# EAGLE board C4 (EAGLE 7.5.0)
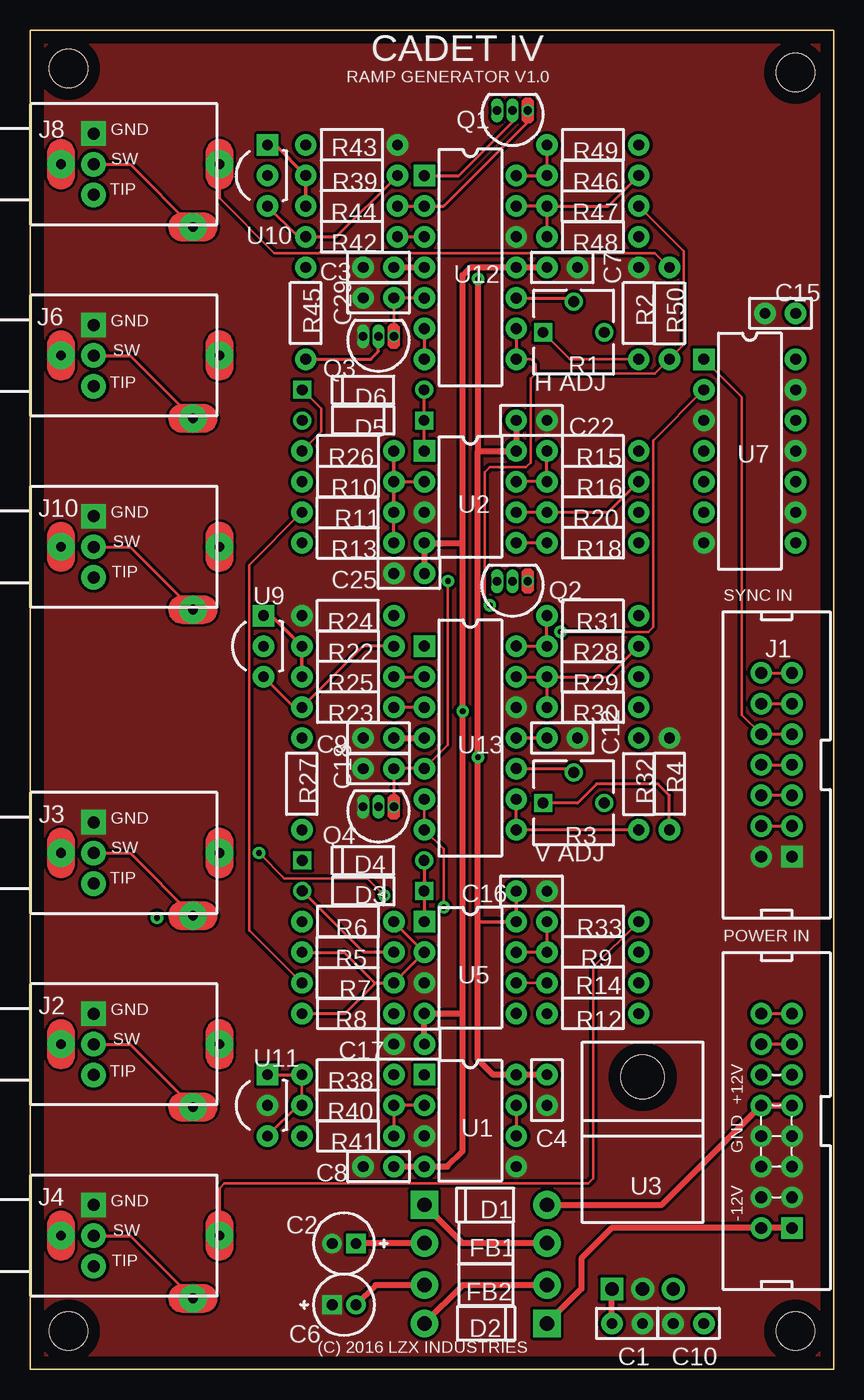
[diagram p0: board, top side]
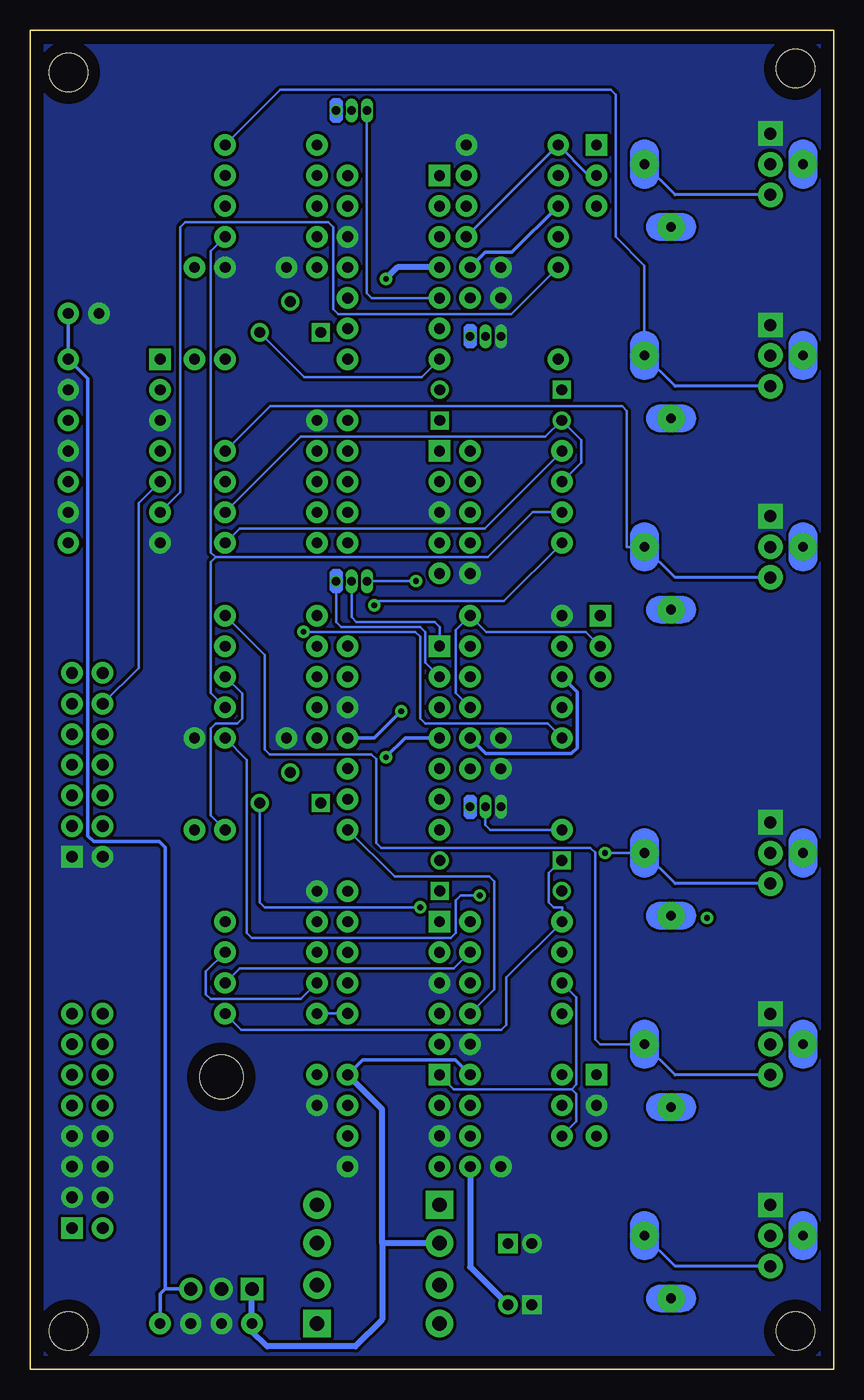
[diagram p1: board, bottom side, seen from below]

Size 66.66 x 111.12 mm. Coordinates in mm from the lower left corner, seen from the top.
Outline: 0,0 66.66,0 66.66,111.12 0,111.12 0,0
Copper layers (1*16): Top 0.035mm / dielectric 1.5mm / Bottom 0.035mm
Design rules "default *": minimum track width 10mil, minimum drill 0.61mm, track to track 8mil, track to pad 8mil, pad to pad 8mil, via to via 8mil, smd to smd 8mil, copper to edge 40mil, drill to drill 8mil, minimum pad ring 0mil, minimum via ring 8mil, stop-mask expansion 2mil, vias tented up to drill 19mil, thermal gap 10mil
Net classes: 1 Power Rails: width 0.305 mm, clearance 0.178 mm, clearance 0.178 mm to class 0
Holes 3.17 mm at 3.18,3.17 3.18,107.95 63.49,3.17 63.49,107.62

## Footprints (pad centres in the part's own frame; a part is rotated, then mirrored left to right if it is on the bottom)
CAP-2.54/6.6x3 = drill 0.889 pad 1.778: 1 -1.27,0; 2 1.27,0
CAPPR-2/5.08 = drill 0.9 pad 1.6 square: 1 -0.991,0 | drill 0.9 pad 1.6: 2 0.991,0
CAP-2.54/6.6x3_C3 = drill 0.889 pad 1.778: 1 -1.27,0; 2 1.27,0
CAP-2.54/6.6x3_C4 = drill 0.889 pad 1.778: 1 -1.27,0; 2 1.27,0
CAPPR-2/5.08_C6 = drill 0.9 pad 1.6 square: 1 -0.991,0 | drill 0.9 pad 1.6: 2 0.991,0
CAP-2.54/6.6x3_C7 = drill 0.889 pad 1.778: 1 -1.27,0; 2 1.27,0
CAP-2.54/6.6x3_C8 = drill 0.889 pad 1.778: 1 -1.27,0; 2 1.27,0
CAP-2.54/6.6x3_C10 = drill 0.889 pad 1.778: 1 -1.27,0; 2 1.27,0
CAP-2.54/6.6x3_C15 = drill 0.889 pad 1.778: 1 -1.27,0; 2 1.27,0
CAP-2.54/6.6x3_C18 = drill 0.889 pad 1.778: 1 -1.27,0; 2 1.27,0
CAP-2.54/6.6x3_C22 = drill 0.889 pad 1.778: 1 -1.27,0; 2 1.27,0
CAP-2.54/6.6x3_C25 = drill 0.889 pad 1.778: 1 -1.27,0; 2 1.27,0
DO-41 = drill 1.2 pad 2.286 square: 1 -5.08,0 | drill 1.2 pad 2.286: 2 5.08,0
DO-41_D2 = drill 1.2 pad 2.286 square: 1 -5.08,0 | drill 1.2 pad 2.286: 2 5.08,0
DO-35 = drill 0.9 pad 1.5 square: 1 -5.05,0 | drill 0.9 pad 1.5: 2 5.05,0
DO-35_D4 = drill 0.9 pad 1.5 square: 1 -5.05,0 | drill 0.9 pad 1.5: 2 5.05,0
FB-10.16/4.45x3.5 = drill 1.194 pad 2.286: 1 -5.08,0; 2 5.08,0
IDC14M = drill 0.965 pad 1.778 square: 1 7.62,1.27 | drill 0.965 pad 1.778: 2 7.62,-1.27; 3 5.08,1.27; 4 5.08,-1.27; 5 2.54,1.27; 6 2.54,-1.27; 7 0,1.27; 8 0,-1.27; 9 -2.54,1.27; 10 -2.54,-1.27; 11 -5.08,1.27; 12 -5.08,-1.27; 13 -7.62,1.27; 14 -7.62,-1.27
PJ302M = drill 0.8 pad 2.286: 1A 2.54,0; 2A 13.487,-5.207; 3A 15.697,0 | drill 1 pad 2.032 square: 1B 5.258,2.54 | drill 1 pad 2.032: 2B 5.258,0; 3B 5.258,-2.54
IDC16M = drill 0.965 pad 1.778 square: 1 8.89,1.27 | drill 0.965 pad 1.778: 2 8.89,-1.27; 3 6.35,1.27; 4 6.35,-1.27; 5 3.81,1.27; 6 3.81,-1.27; 7 1.27,1.27; 8 1.27,-1.27; 9 -1.27,1.27; 10 -1.27,-1.27; 11 -3.81,1.27; 12 -3.81,-1.27; 13 -6.35,1.27; 14 -6.35,-1.27; 15 -8.89,1.27; 16 -8.89,-1.27
TO-92 = drill 0.7 pad 1: 1 -1.27,0 | drill 0.7 pad 1 long: 2 0,0; 3 1.27,0
TO-92_Q2 = drill 0.7 pad 1: 1 -1.27,0 | drill 0.7 pad 1 long: 2 0,0; 3 1.27,0
TO-92_Q3 = drill 0.7 pad 1: 1 -1.27,0 | drill 0.7 pad 1 long: 2 0,0; 3 1.27,0
3362P = drill 0.9 pad 1.5 square: 1 -1.27,2.54 | drill 0.9 pad 1.5: 2 1.27,0; 3 -1.27,-2.54
RES-7.62/5.1x2.5 = drill 0.889 pad 1.778: 1 -3.81,0; 2 3.81,0
RES-7.62/5.1x2.5_R6 = drill 0.889 pad 1.778: 1 -3.81,0; 2 3.81,0
DIP-8 = drill 0.9 pad 1.778 square: 1 -3.81,3.81 | drill 0.9 pad 1.778: 2 -3.81,1.27; 3 -3.81,-1.27; 4 -3.81,-3.81; 5 3.81,-3.81; 6 3.81,-1.27; 7 3.81,1.27; 8 3.81,3.81
TO-220H = drill 1.1 pad 1.9 square: 1 -2.54,0 | drill 1.1 pad 1.9: 2 0,0; 3 2.54,0 | hole 3.6: 0,17.6
DIP-14 = drill 0.9 pad 1.778 square: 1 -3.81,7.62 | drill 0.9 pad 1.778: 2 -3.81,5.08; 3 -3.81,2.54; 4 -3.81,0; 5 -3.81,-2.54; 6 -3.81,-5.08; 7 -3.81,-7.62; 8 3.81,-7.62; 9 3.81,-5.08; 10 3.81,-2.54; 11 3.81,0; 12 3.81,2.54; 13 3.81,5.08; 14 3.81,7.62
TO-92-100R = drill 0.889 pad 1.778 square: 1 2.54,0 | drill 0.889 pad 1.778: 2 0,0; 3 -2.54,0
TO-92-100R_U10 = drill 0.889 pad 1.778 square: 1 2.54,0 | drill 0.889 pad 1.778: 2 0,0; 3 -2.54,0

## Placement (x,y rotation side)
C1  330n  [CAP-2.54/6.6x3]  49.53,3.81 0 top
C2  10u 25V  [CAPPR-2/5.08]  26.04,10.44 180 top
C3  100n  [CAP-2.54/6.6x3_C3]  28.89,91.44 180 top
C4  100n  [CAP-2.54/6.6x3_C4]  42.86,23.18 270 top
C6  10u 25V  [CAPPR-2/5.08_C6]  26.04,5.36 0 top
C7  100n  [CAP-2.54/6.6x3_C7]  44.13,91.44 180 top
C8  100n  [CAP-2.54/6.6x3_C8]  28.89,16.83 0 top
C9  100n  [CAP-2.54/6.6x3_C3]  28.89,52.39 180 top
C10  100n  [CAP-2.54/6.6x3_C10]  54.61,3.81 180 top
C12  100n  [CAP-2.54/6.6x3_C7]  44.13,52.39 180 top
C15  100n  [CAP-2.54/6.6x3_C15]  62.23,87.63 180 top
C16  100n  [CAP-2.54/6.6x3_C8]  41.59,39.69 0 top
C17  100n  [CAP-2.54/6.6x3_C8]  31.43,26.99 0 top
C18  4.7uF COG/NPO  [CAP-2.54/6.6x3_C18]  28.89,49.85 180 top
C22  100n  [CAP-2.54/6.6x3_C22]  41.59,78.74 0 top
C25  100n  [CAP-2.54/6.6x3_C25]  31.43,66.04 0 top
C29  15pF COG/NPO  [CAP-2.54/6.6x3_C18]  28.89,88.9 180 top
D1  1N4001  [DO-41]  37.78,13.65 0 top
D2  1N4001  [DO-41_D2]  37.78,3.81 180 top
D3  1N5711  [DO-35]  27.62,39.69 180 top
D4  1N5711  [DO-35_D4]  27.62,42.23 0 top
D5  1N5711  [DO-35]  27.62,78.74 180 top
D6  1N5711  [DO-35_D4]  27.62,81.28 0 top
FB1  68R  [FB-10.16/4.45x3.5]  37.78,10.48 180 top
FB2  68R  [FB-10.16/4.45x3.5]  37.78,6.99 180 top
J1  LZXSYNC14  [IDC14M]  61.91,50.16 270 top
J2  3.5MM JACK  [PJ302M]  0.01,26.97 0 top
J3  3.5MM JACK  [PJ302M]  0.01,42.85 0 top
J4  3.5MM JACK  [PJ302M]  0.01,11.1 0 top
J6  3.5MM JACK  [PJ302M]  0.01,84.12 0 top
J8  3.5MM JACK  [PJ302M]  0.01,100 0 top
J9  2X8 PIN HEADER  [IDC16M]  61.91,20.62 270 top
J10  3.5MM JACK  [PJ302M]  0.01,68.25 0 top
Q1  2N3906  [TO-92]  40.01,104.46 180 top
Q2  2N3906  [TO-92_Q2]  40.01,65.41 180 top
Q3  BS170  [TO-92_Q3]  28.89,85.72 180 top
Q4  BS170  [TO-92_Q3]  28.89,46.67 180 top
R1  10K  [3362P]  45.09,87.31 90 top
R2  10K  [RES-7.62/5.1x2.5]  50.48,87.63 90 top
R3  10K  [3362P]  45.09,48.26 90 top
R4  10K  [RES-7.62/5.1x2.5]  53.02,48.58 90 top
R5  1K  [RES-7.62/5.1x2.5]  26.35,34.61 0 top
R6  1K  [RES-7.62/5.1x2.5_R6]  26.35,37.15 180 top
R7  2K  [RES-7.62/5.1x2.5]  26.35,32.07 0 top
R8  499R  [RES-7.62/5.1x2.5_R6]  26.35,29.53 180 top
R9  1K  [RES-7.62/5.1x2.5_R6]  46.67,34.61 180 top
R10  1K  [RES-7.62/5.1x2.5_R6]  26.35,73.66 180 top
R11  2K  [RES-7.62/5.1x2.5]  26.35,71.12 0 top
R12  499R  [RES-7.62/5.1x2.5_R6]  46.67,29.53 180 top
R13  499R  [RES-7.62/5.1x2.5]  26.35,68.58 0 top
R14  1K  [RES-7.62/5.1x2.5_R6]  46.67,32.07 180 top
R15  499R  [RES-7.62/5.1x2.5_R6]  46.67,76.2 180 top
R16  1K  [RES-7.62/5.1x2.5_R6]  46.67,73.66 180 top
R18  499R  [RES-7.62/5.1x2.5_R6]  46.67,68.58 180 top
R20  1K  [RES-7.62/5.1x2.5_R6]  46.67,71.12 180 top
R22  10K  [RES-7.62/5.1x2.5_R6]  26.35,60.01 180 top
R23  10K  [RES-7.62/5.1x2.5_R6]  26.35,54.93 180 top
R24  1K  [RES-7.62/5.1x2.5]  26.35,62.55 0 top
R25  4.99K  [RES-7.62/5.1x2.5_R6]  26.35,57.47 180 top
R26  1K  [RES-7.62/5.1x2.5_R6]  26.35,76.2 180 top
R27  100R  [RES-7.62/5.1x2.5]  22.54,48.58 90 top
R28  10K  [RES-7.62/5.1x2.5]  46.67,60.01 0 top
R29  10K  [RES-7.62/5.1x2.5]  46.67,57.47 0 top
R30  20K  [RES-7.62/5.1x2.5_R6]  46.67,54.93 180 top
R31  499R  [RES-7.62/5.1x2.5_R6]  46.67,62.55 180 top
R32  499R  [RES-7.62/5.1x2.5_R6]  50.48,48.58 270 top
R33  499R  [RES-7.62/5.1x2.5_R6]  46.67,37.15 180 top
R38  4.99K  [RES-7.62/5.1x2.5]  26.35,24.45 0 top
R39  10K  [RES-7.62/5.1x2.5_R6]  26.67,99.06 180 top
R40  12.4K  [RES-7.62/5.1x2.5]  26.35,21.91 0 top
R41  10K  [RES-7.62/5.1x2.5_R6]  26.35,19.37 180 top
R42  10K  [RES-7.62/5.1x2.5_R6]  26.67,93.98 180 top
R43  1K  [RES-7.62/5.1x2.5_R6]  26.67,101.6 180 top
R44  4.99K  [RES-7.62/5.1x2.5_R6]  26.67,96.52 180 top
R45  100R  [RES-7.62/5.1x2.5]  22.86,87.63 90 top
R46  10K  [RES-7.62/5.1x2.5]  46.67,99.06 0 top
R47  10K  [RES-7.62/5.1x2.5]  46.67,96.52 0 top
R48  20K  [RES-7.62/5.1x2.5_R6]  46.67,93.98 180 top
R49  499R  [RES-7.62/5.1x2.5_R6]  46.67,101.6 180 top
R50  499R  [RES-7.62/5.1x2.5_R6]  53.02,87.63 270 top
U1  TL072P  [DIP-8]  36.51,20.64 0 top
U2  LM6172  [DIP-8]  36.51,72.39 0 top
U3  7805  [TO-220H]  50.8,6.67 0 top
U5  LM6172  [DIP-8]  36.51,33.34 0 top
U7  74HC14  [DIP-14]  59.69,76.2 0 top
U9  TL431  [TO-92-100R]  19.37,60.01 90 top
U10  TL431  [TO-92-100R_U10]  19.69,99.06 90 top
U11  TL431  [TO-92-100R]  19.69,21.91 90 top
U12  TL074  [DIP-14]  36.51,91.44 0 top
U13  TL074  [DIP-14]  36.51,52.39 0 top

## Library data of the parts
C1-C4 C6-C10 C12 C15-C18 C22 C25 C29 D1 D2 J1 J9 Q1 Q2 R2 R4-R16 R18 R20 R22-R33 R38-R50 = common
D3-D6 = common; DATASHEET: http://datasheets.diptrace.com\fairchild\1N4148.pdf; MANUFACTURER: Fairchild
FB1 FB2 = common; MANUFACTURER: Fair-Rite
J2-J4 J6 J8 J10 = common; DATASHEET: http://www.thonk.co.uk/shop/pj302m/
Q3 Q4 = common; DATASHEET: http://datasheets.diptrace.com/motorola/BS170.pdf; MANUFACTURER: Motorola
R1 R3 = common; DATASHEET: http://datasheets.diptrace.com/potentiometers/bourns_trimpot_catalog.pdf; MANUFACTURER: Bourns
U1 U2 U5 = common; DATASHEET: http://datasheets.diptrace.com\ti\TL07x.pdf; MANUFACTURER: Texas Instruments
U3 = common; MANUFACTURER: Atmel
U7 = common; MANUFACTURER: National Semiconductor
U9-U11 = common; DATASHEET: http://datasheets.diptrace.com\st_micro\CD00000986.pdf; MANUFACTURER: ST Microelectronics
U12 U13 = common; DATASHEET: http://datasheets.diptrace.com/ti/TL07x.pdf; MANUFACTURER: Texas Instruments

## Nets
0V: C1.2 C2.2 C3.2 C4.2 C6.1 C7.1 C8.1 C9.2 C10.2 C12.1 C15.2 C16.2 C17.1 C18.2 C22.2 C25.1 C29.2 J1.1 J1.2 J2.1A J2.1B J3.1A J3.1B J4.1A J4.1B J6.1A J6.1B J8.1A J8.1B J9.3 J9.4 J9.5 J9.6 J9.7 J9.8 J10.1A J10.1B Q3.3 Q4.3 R2.2 R4.2 R24.1 R43.1 U1.3 U1.5 U2.3 U3.2 U5.3 U7.3 U7.7 U7.9 U7.11 U7.13 U11.2 U12.12 U13.12
+5V [Power Rails]: C10.1 C15.1 U3.3 U7.14
+12V [Power Rails]: C1.1 C2.1 C3.1 C4.1 C9.1 C16.1 C22.1 FB1.2 R22.2 R25.2 R38.2 R39.2 R44.2 U1.8 U2.8 U3.1 U5.8 U9.1 U10.1 U12.4 U13.4
-2V_Reference: R7.1 R11.1 R30.1 R41.2 R48.1 U1.1
-12V [Power Rails]: C6.2 C7.2 C8.2 C12.2 C17.2 C25.2 FB2.2 U1.4 U2.4 U5.4 U12.11 U13.11
_HSYNC: R45.2 U7.6
_VSYNC: R27.2 U7.2
Net_0: J1.7 J1.8
Net_1: D2.2 FB2.1
Net_2: D1.1 FB1.1
Net_3: U1.6 U1.7
Net_4: J1.11 J1.12 U7.5
Net_5: D2.1 J9.1 J9.2
Net_6: J1.13 J1.14
Net_7: J6.2A J6.2B
Net_8: R39.1 R42.2 U10.3
Net_9: J8.2A J8.2B
Net_10: R22.1 R23.2 U9.3
Net_11: R12.2 U5.5
Net_12: R9.2 R33.2 U5.7
Net_13: R5.1 R6.1 R7.2 R8.2 U5.2
Net_14: D3.1 D4.2 U5.1
Net_15: R28.1 R31.2 U13.14
Net_16: R18.2 U2.5
Net_17: R15.2 R16.2 U2.7
Net_18: D3.2 R5.2 R14.1
Net_19: D4.1 R6.2 R12.1
Net_21: R10.1 R11.2 R13.2 R26.1 U2.2
Net_22: D5.1 D6.2 U2.1
Net_25: R23.1 R24.2 U9.2 U13.3
Net_26: Q2.1 R25.1 U13.2
Net_27: Q2.2 U13.1
Net_28: C18.1 Q2.3 Q4.1 U13.5
Net_29: Q4.2 R27.1
Net_30: R3.3 U13.6 U13.7
Net_31: R8.1 R29.2 R32.2 U13.8 U13.9
Net_32: R28.2 R29.1 R30.2 U13.13
Net_33: D1.2 J9.9 J9.10
Net_34: R9.1 R14.2 U5.6
Net_35: J2.3A J2.3B R31.1
Net_36: J3.3A J3.3B R32.1
Net_37: J4.3A J4.3B R33.1
Net_38: R3.2 U13.10
Net_39: R3.1 R4.1
Net_40: R46.1 R49.2 U12.14
Net_45: D5.2 R10.2 R20.1
Net_46: D6.1 R18.1 R26.2
Net_51: Q3.2 R45.1
Net_56: J1.9 J1.10 U7.1
Net_57: J6.3A J6.3B R49.1
Net_58: J8.3A J8.3B R50.1
Net_59: J10.3A J10.3B R15.1
Net_60: R1.2 U12.10
Net_61: R1.1 R2.1
Net_62: J1.5 J1.6
Net_63: J1.3 J1.4
Net_64: J2.2A J2.2B
Net_65: J3.2A J3.2B
Net_66: J4.2A J4.2B
Net_67: R38.1 R40.1 U11.1 U11.3
Net_68: R40.2 R41.1 U1.2
Net_69: J9.11 J9.12
Net_70: J9.13 J9.14
Net_71: J9.15 J9.16
Net_72: J10.2A J10.2B
Net_73: R42.1 R43.2 U10.2 U12.3
Net_74: Q1.1 R44.1 U12.2
Net_75: Q1.2 U12.1
Net_76: C29.1 Q1.3 Q3.1 U12.5
Net_78: R1.3 U12.6 U12.7
Net_80: R13.1 R47.2 R50.2 U12.8 U12.9
Net_81: R46.2 R47.1 R48.2 U12.13
Net_83: R16.1 R20.2 U2.6

## Tracks (layer width: path | path; a pad name or v marks a point on that pad's centre or on a via)
0V
  pour Top (isolate 0.254): 0.61,0.61 66.05,0.61 66.05,110.52 0.61,110.52
  pour Bottom (isolate 0.254): 0.6,0.6 66.07,0.6 66.07,110.53 0.6,110.53
+5V
  Bottom 0.305: C15.1 U7.14 61.89,82.21 61.89,44.27 61.41,43.79 55.96,43.79 55.47,43.31 55.47,6.67 | 55.47,6.67 55.88,6.26 C10.1 | 55.47,6.67 | 55.47,6.67 U3.3
+12V  (via drill 0.48 pad 1.02)
  Top 0.305: R44.2 R39.2 20.32,101.6 U10.1 | U9.1 20,62.55 R22.2 R25.2 | C16.1 U5.8 37.15,37.15
  Top 0.508: FB1.2 27.07,10.48 C2.1 | C1.1 U3.1 | C9.1 U13.4 | C4.1 U1.8 38.42,24.45 37.15,25.72 37.15,37.15 v37.15,50.8 37.15,76.2 | 37.15,76.2 U2.8 C22.1 | C3.1 U12.4 | U12.4 | v37.15,90.49 37.15,76.2
  Bottom 0.305: U13.4 35.56,52.39 v37.15,50.8 | C9.1 28.87,51.09 21.78,51.09 21.3,51.57 21.3,56.22 R25.2 | C3.1 28.92,92.69 26.7,92.69 R44.2 | U1.8 39.08,25.69 31.41,25.69 R38.2
  Bottom 0.508: U12.4 36.2,91.44 v37.15,90.49 | FB1.2 37.47,10.48 | 37.47,10.48 37.47,21.59 U1.8 | 37.47,10.48 37.47,4.13 39.69,1.9 46.99,1.9 48.26,3.17 U3.1
-2V_Reference
  Top 0.203: R7.1 18.17,36.44 18.17,66.75 R11.1
  Bottom 0.203: R11.1 24.98,71.12 28.71,67.39 51.27,67.39 | 51.27,67.39 51.68,67.79 51.68,92.79 R48.1 | 51.27,67.39 51.68,66.98 51.68,56.12 R30.1 | R7.1 21.35,30.87 21.35,23.66 21.76,23.25 | 21.76,23.25 31.51,23.25 U1.1 | 21.76,23.25 21.35,22.85 21.35,20.56 R41.2
-12V  (via drill 0.48 pad 1.02)
  Top 0.305: U13.11 C12.2 | v35.88,54.61 35.88,55.46
  Top 0.508: FB2.2 28.65,6.99 C6.2 | C8.2 U1.4 34.61,16.83 35.88,18.1 35.88,29.53 | 35.88,29.53 35.88,55.46 35.88,68.58 | 35.88,68.58 35.88,90.81 36.51,91.44 U12.11 C7.2 | C25.2 U2.4 35.88,68.58 | C17.2 U5.4 35.88,29.53
  Bottom 0.305: U13.11 38.1,52.39 v35.88,54.61
  Bottom 0.508: C8.2 30.16,8.5 C6.2
_HSYNC
  Bottom 0.203: R45.2 26.75,87.55 41.11,87.55 41.52,87.96 41.52,94.77 41.92,95.17 53.81,95.17 54.22,94.77 54.22,72.78 U7.6
_VSYNC  (via drill 0.48 pad 1.02)
  Top 0.203: v44,61.2 51.27,61.2 51.68,61.61 51.68,77.08 U7.2
  Bottom 0.203: v44,61.2 34.71,61.2 34.3,60.8 34.3,53.99 33.9,53.58 23.74,53.58 R27.2
Net_0
  Top 0.229: J1.8 J1.7
Net_1
  Top 0.508: FB2.1 35.88,6.99 D2.2
Net_2
  Top 0.508: FB1.1 35.88,10.48 D1.1
Net_3
  Top 0.229: U1.7 U1.6
Net_4
  Top 0.229: J1.12 J1.11
  Bottom 0.203: J1.12 57.67,58.21 57.67,71.87 U7.5
Net_5
  Top 0.508: J9.1 J9.2 48.25,11.73 45.72,9.21 45.72,6.67 D2.1
Net_6
  Top 0.229: J1.14 J1.13
Net_7
  Top 0.229: J6.2B 8.29,84.12 J6.2A
Net_8
  Top 0.229: U10.3 22.22,93.98 R42.2 25.4,93.98 R39.1
Net_9
  Top 0.229: J8.2B 8.29,100 J8.2A
Net_10
  Top 0.229: R22.1 27.62,60.01 R23.2 21.91,54.93 U9.3
Net_11
  Bottom 0.203: U5.5 R12.2
Net_12
  Top 0.229: R33.2 R9.2 U5.7
Net_13
  Top 0.229: R6.1 U5.2 R7.2 28.68,32.07 | R5.1 26.04,34.61 28.57,32.07 28.68,32.07 | R8.2 26.14,29.53 28.68,32.07
Net_14
  Top 0.229: D4.2 D3.1 32.67,37.18 U5.1
Net_15
  Top 0.229: U13.14 R28.1 R31.2
Net_16
  Top 0.229: R18.2 U2.5
Net_17
  Top 0.229: U2.7 R16.2 R15.2
Net_18
  Top 0.229: R5.2 27.65,34.61 D3.2
  Bottom 0.203: R5.2 31.51,33.26 49.29,33.26 R14.1
Net_19
  Bottom 0.203: D4.1 23.63,41.17 23.63,38.75 23.22,38.34 22.54,38.34 R6.2 27.19,32.5 27.19,28.59 27.59,28.18 49.14,28.18 R12.1
Net_21
  Top 0.229: R13.2 R26.1 R10.1 | R10.1 R11.2 | R10.1 U2.2
Net_22
  Top 0.229: U2.1 32.7,78.71 D5.1 D6.2
Net_25
  Top 0.229: U13.3 R23.1
  Bottom 0.203: R23.1 31.36,56.12 31.36,61.35 R24.2 28.82,61.2 20.56,61.2 U9.2
Net_26
  Top 0.229: R25.1 U13.2
  Bottom 0.203: U13.2 33.9,58.66 33.9,61.2 34.3,61.61 40.87,61.61 41.28,62.01 Q2.1
Net_27
  Bottom 0.203: Q2.2 40,62.42 39.6,62.01 33.11,62.01 32.7,61.61 U13.1
Net_28  (via drill 0.48 pad 1.02)
  Top 0.203: U13.5 34.66,51.8 v34.66,65.41
  Top 0.229: U13.5 C18.1 Q4.1
  Bottom 0.203: v34.66,65.41 Q2.3
Net_29
  Bottom 0.203: R27.1 28.49,44.77 28.89,45.17 Q4.2
Net_30  (via drill 0.48 pad 1.02)
  Top 0.203: v34.3,38.34 34.3,43.17 U13.7 U13.6
  Bottom 0.203: v34.3,38.34 47.22,38.34 47.62,38.75 R3.3
Net_31
  Top 0.229: R32.2 U13.8 U13.9
  Bottom 0.203: U13.8 36.44,40.88 28.56,40.88 28.16,40.47 28.16,31.53 R8.1 | R32.2 51.68,45.96 51.68,53.17 51.27,53.58 49.49,53.58 49.09,53.99 49.09,56.07 R29.2
Net_32
  Top 0.229: U13.13 R29.1 | R29.1 R30.2 | R29.1 47.94,57.47 R28.2
Net_33
  Top 0.508: D1.2 52.4,13.65 J9.10 J9.9
Net_34
  Top 0.203: R14.2 U5.6
  Bottom 0.203: R14.2 44.21,30.72 51.68,30.72 52.08,31.13 52.08,33.01 R9.1
Net_35
  Bottom 0.203: J2.3A 19.39,26.97 19.8,27.38 19.8,42.88 20.21,43.28 37.55,43.28 37.96,43.69 37.96,50.63 38.37,51.04 46.79,51.04 47.2,51.45 47.2,59.26 R31.1
  Bottom 0.229: J2.3B 13.17,24.43 J2.3A
Net_36  (via drill 0.48 pad 1.02)
  Top 0.203: v18.99,42.85 21.09,40.74 27.97,40.74 v29.38,39.33
  Bottom 0.203: R32.1 48.68,50.58 48.68,36.21 48.27,35.8 31.76,35.8 31.36,36.21 31.36,38.93 30.95,39.33 v29.38,39.33 | J3.3A v18.99,42.85
  Bottom 0.229: J3.3B 13.17,40.31 J3.3A
Net_37
  Top 0.203: J4.3A 15.71,15.03 16.12,15.43 46.31,15.43 46.71,15.84 46.71,33.38 R33.1
  Bottom 0.229: J4.3B 13.17,8.56 J4.3A
Net_38
  Top 0.229: U13.10 44.77,49.85 R3.2
Net_39
  Top 0.229: R4.1 53.02,47.62 52.07,48.58 46.99,48.58 45.4,46.99 R3.1
Net_40
  Top 0.229: U12.14 R46.1 R49.2
Net_45
  Bottom 0.203: R10.2 20.94,75.26 20.94,77.11 D5.2 23.92,77.39 44.21,77.39 R20.1
Net_46
  Top 0.203: R26.2 24.14,77.8 24.14,79.71 D6.1
  Bottom 0.203: R26.2 28.97,69.77 49.29,69.77 R18.1
Net_51
  Top 0.229: R45.1 28.26,83.82 28.89,84.45 Q3.2
Net_56
  Top 0.203: J1.10 59.04,54.3 59.04,80.66 U7.1
  Top 0.229: J1.10 J1.9
Net_57
  Bottom 0.203: J6.3A 15.71,91.6 18.09,93.97 18.09,105.76 18.49,106.17 45.91,106.17 R49.1
  Bottom 0.229: J6.3B 13.17,81.59 J6.3A
Net_58
  Top 0.203: J8.3A 15.71,97.18 20.25,92.63 51.83,92.63 R50.1
  Bottom 0.229: J8.3B 13.17,97.46 J8.3A
Net_59
  Bottom 0.203: J10.3A 17.16,68.25 17.16,79.53 17.56,79.93 46.75,79.93 R15.1
  Bottom 0.229: J10.3B 13.17,65.71 J10.3A
Net_60
  Top 0.229: U12.10 44.77,88.9 R1.2
Net_61
  Top 0.203: R2.1 44.77,83.82 R1.1
Net_62
  Top 0.229: J1.5 J1.6
Net_63
  Top 0.229: J1.4 J1.3
Net_64
  Top 0.229: J2.2B 8.29,26.97 J2.2A
Net_65
  Top 0.229: J3.2B 8.29,42.85 J3.2A
Net_66
  Top 0.229: J4.2B 8.29,11.1 J4.2A
Net_67
  Top 0.203: R38.1 R40.1
  Top 0.229: R40.1 22.22,21.91 U11.3 | U11.1 R38.1
Net_68
  Top 0.229: U1.2 R40.2 R41.1
Net_69
  Top 0.229: J9.12 J9.11
Net_70
  Top 0.229: J9.13 J9.14
Net_71
  Top 0.229: J9.15 J9.16
Net_72
  Top 0.229: J10.2B 8.29,68.25 J10.2A
Net_73
  Top 0.229: R42.1 U12.3
  Bottom 0.229: U10.2 20.32,99.06 R43.2 R42.1
Net_74
  Top 0.229: R44.1 U12.2 34.29,96.52 41.28,103.5 Q1.1
Net_75
  Top 0.229: U12.1 35.56,99.06 40,103.5 Q1.2
Net_76
  Top 0.229: Q3.1 C29.1 U12.5
  Bottom 0.203: U12.5 38.33,88.9 38.73,89.31 Q1.3
Net_78
  Top 0.229: U12.6 U12.7
  Bottom 0.203: U12.7 34.19,82.34 43.92,82.34 R1.3
Net_80  (via drill 0.48 pad 1.02)
  Top 0.203: U12.8 41.52,83.82 41.92,83.41 41.92,82.63 | 41.92,82.63 51.83,82.63 R50.2 54.22,85.01 54.22,92.79 R47.2 | 41.92,82.63 41.52,82.22 41.52,75.26 41.11,74.85 38.11,74.85 37.71,74.45 37.71,63.8 v38.11,63.4
  Top 0.229: U12.9 U12.8
  Bottom 0.203: v38.11,63.4 37.77,63.74 27.38,63.74 R13.1
Net_81
  Top 0.229: R47.1 U12.13 | R47.1 R48.2 | R47.1 47.94,96.52 R46.2
Net_83
  Top 0.229: U2.6 R20.2 47.94,71.12 R16.1
S$1  (via drill 0.48 pad 1.02)
  other vias: 10.53,37.46

## Text on the board
tPlace: CADET IV | RAMP GENERATOR V1.0 | GND | Q1 | J8 | SW | R43 | R49 | TIP | R39 | R46 | R44 | R47 | U10 | R42 | R48 | C3 | U12 | C7 | C15 | GND | J6 | R45 | C29 | R2 | R50 | SW | TIP | Q3 | H ADJ | R1 | D6 | D5 | C22 | R26 | R15 | U7 | R10 | R16 | GND | U2 | J10 | SW | R11 | R20 | R13 | R18 | TIP | C25 | Q2 | SYNC IN | U9 | R24 | R31 | J1 | R22 | R28 | R25 | R29 | R23 | R30 | C9 | U13 | C12 | C18 | R27 | R32 | R4 | GND | J3 | SW | Q4 | V ADJ | R3 | TIP | D4 | D3 | C16 | R6 | R33 | POWER IN | R5 | R9 | U5 | R14 | GND | R7 | J2 | SW | R8 | R12 | TIP | U11 | C17 | R38 | +12V | R40 | U1 | R41 | C4 | GND | C8 | GND | U3 | J4 | SW | D1 | -12V | C2 | TIP | FB1 | FB2 | C6 | (C) 2016 LZX INDUSTRIES | D2 | C1 | C10
tDocu: Q1 | J8 | R43 | R49 | R39 | R46 | R44 | R47 | U10 | R42 | R48 | C3 | U12 | C7 | C15 | J6 | R45 | C29 | R2 | R50 | Q3 | R1 | D6 | D5 | C22 | R26 | R15 | U7 | R10 | R16 | U2 | J10 | R11 | R20 | R13 | R18 | C25 | Q2 | U9 | R24 | R31 | J1 | R22 | R28 | R25 | R29 | R23 | R30 | C9 | U13 | C12 | C18 | R27 | R32 | R4 | J3 | Q4 | R3 | D4 | D3 | C16 | R6 | R33 | R5 | R9 | U5 | R14 | R7 | J2 | R8 | R12 | U11 | C17 | R38 | R40 | U1 | R41 | C4 | C8 | U3 | J4 | D1 | C2 | FB1 | FB2 | C6 | D2 | C1 | C10